# EAGLE board Battery Board v2 (EAGLE 6.4)
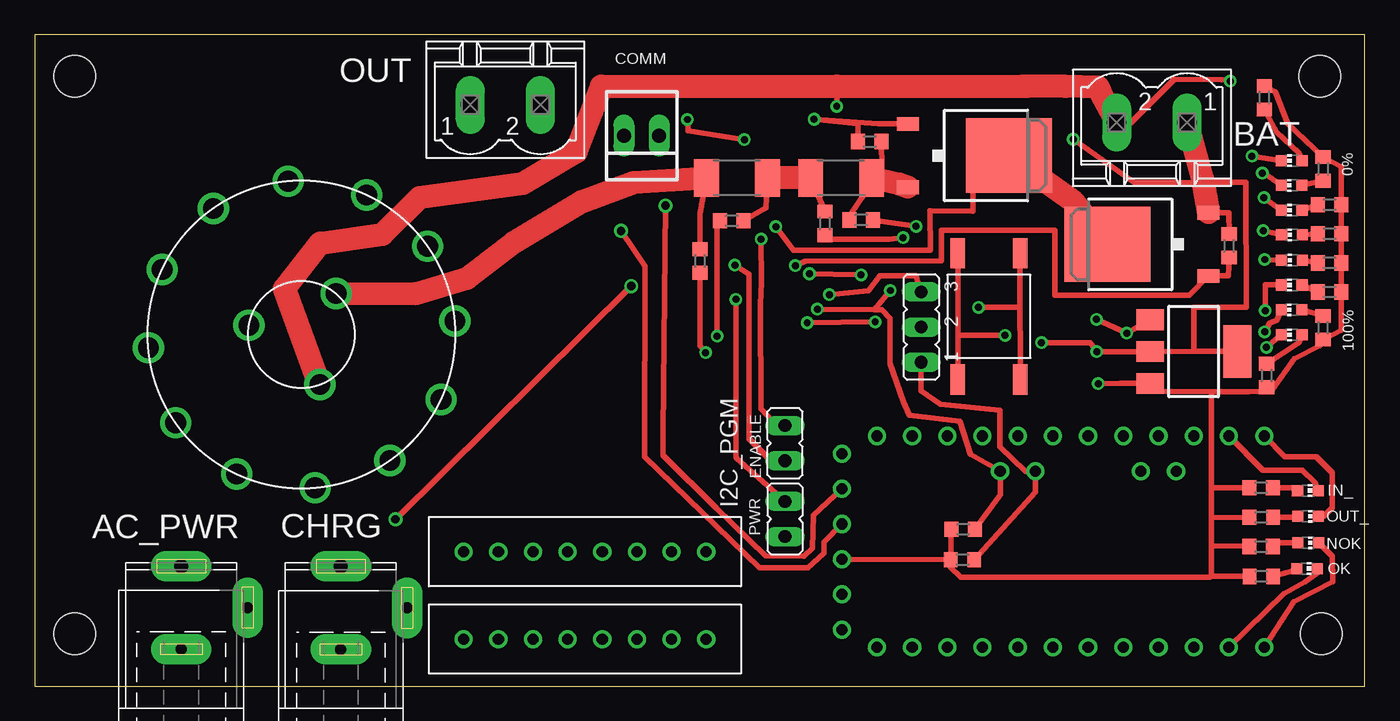
[diagram p0: board, top side]
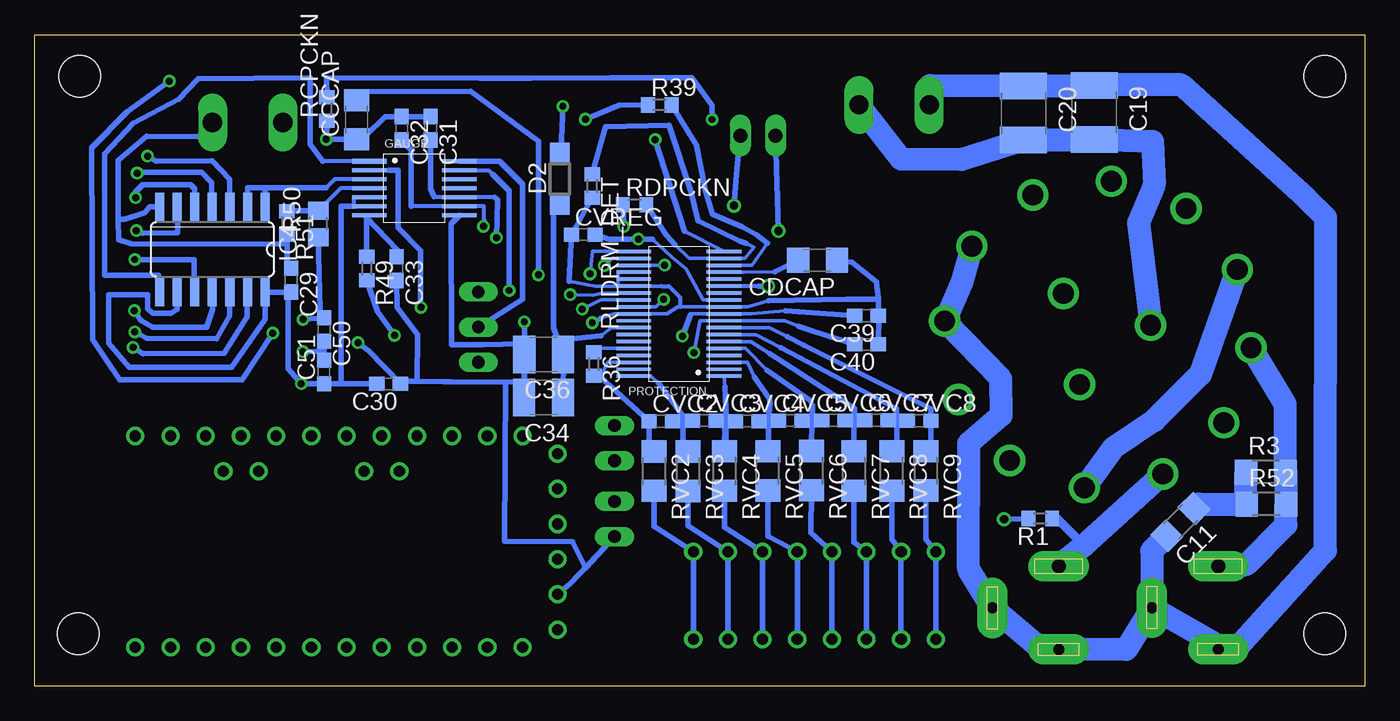
[diagram p1: board, bottom side, seen from below]

Size 96 x 47 mm. Coordinates in mm from the lower left corner, seen from the top.
Outline: 0,0 96,0 96,47 0,47 0,0
Copper layers (1*16): Top 0.035mm / dielectric 1.5mm / Bottom 0.035mm
Design rules "default *": minimum track width 8mil, minimum drill 0.3mm, track to track 8mil, track to pad 8mil, pad to pad 8mil, via to via 8mil, smd to smd 8mil, copper to edge 40mil, drill to drill 8mil, minimum pad ring 10mil, minimum via ring 8mil, stop-mask expansion 4mil, vias tented up to drill 0mil, thermal gap 10mil
Holes 3 mm at 2.89,3.77 2.89,44 92.76,44 92.84,3.78

## Footprints (pad centres in the part's own frame; a part is rotated, then mirrored left to right if it is on the bottom)
SPC4078 = drill 0.8 pad 2.184 long: 1 -3,0; 2 0,-4.8 | drill 1 pad 2.184 long: 3 3,0
MSTBV2 = drill 1.397 long: 1 -2.54,0; 2 2.54,0
8PIN-2.5MM = drill 0.8: P$1 0,8.75; P$2 0,6.25; P$3 0,3.75; P$4 0,1.25; P$5 0,-1.25; P$6 0,-3.75; P$7 0,-6.25; P$8 0,-8.75
C1206 = smd 1.6 x 1.8: 1 -1.4,0; 2 1.4,0
C1812 = smd 1.9 x 3.4: 1 -1.95,0; 2 1.95,0
C0603 = smd 1.1 x 1: 1 -0.85,0; 2 0.85,0
C1210 = smd 1.6 x 2.7: 1 -1.4,0; 2 1.4,0
22-23-2021 = drill 1 long: 1 -1.27,0; 2 1.27,0
SOD123 = smd 1.4 x 1.4: A 1.9,0; C -1.9,0
JP1 = drill 0.914 long: 1 0,-1.27; 2 0,1.27
TSSOP-14-0.65MM = smd 2.5 x 0.35: 1 -3.25,1.95 | smd 2.5 x 0.3: 2 -3.25,1.3; 3 -3.25,0.65; 4 -3.25,0; 5 -3.25,-0.65; 6 -3.25,-1.3; 7 -3.25,-1.95; 8 3.25,-1.95; 9 3.25,-1.3; 10 3.25,-0.65; 11 3.25,0; 12 3.25,0.65; 13 3.25,1.3; 14 3.25,1.95
JP2 = drill 0.914 long: 1 -2.54,0; 2 0,0; 3 2.54,0
SO14 = smd 0.66 x 2.032: 1 -3.81,-3.073; 2 -2.54,-3.073; 3 -1.27,-3.073; 4 0,-3.073; 5 1.27,-3.073; 6 2.54,-3.073; 7 3.81,-3.073; 8 3.81,3.073; 9 2.54,3.073; 10 1.27,3.073; 11 0,3.073; 12 -1.27,3.073; 13 -2.54,3.073; 14 -3.81,3.073
CHIP-LED0603 = smd 0.8 x 0.8: A 0,-0.75; C 0,0.75
TSSOP-38-0.5MM = smd 2.5 x 0.25: 1 -3.25,4.65; 2 -3.25,4.15; 3 -3.25,3.65; 4 -3.25,3.15; 5 -3.25,2.65; 6 -3.25,2.15; 7 -3.25,1.65; 8 -3.25,1.15; 9 -3.25,0.65; 10 -3.25,0.15; 11 -3.25,-0.35; 12 -3.25,-0.85; 13 -3.25,-1.35; 14 -3.25,-1.85; 15 -3.25,-2.35; 16 -3.25,-2.85; 17 -3.25,-3.35; 18 -3.25,-3.85; 19 -3.25,-4.35; 20 3.25,-4.35; 21 3.25,-3.85; 22 3.25,-3.35; 23 3.25,-2.85; 24 3.25,-2.35; 25 3.25,-1.85; 26 3.25,-1.35; 27 3.25,-0.85; 28 3.25,-0.35; 29 3.25,0.15; 30 3.25,0.65; 31 3.25,1.15; 32 3.25,1.65; 33 3.25,2.15; 34 3.25,2.65; 35 3.25,3.15; 36 3.25,3.65; 37 3.25,4.15; 38 3.25,4.65
TO252 = smd 1 x 1.6: 1 -2.28,-4.8; 2 2.28,-4.8 | smd 5.4 x 6.2: 3 0,2.5
R0603 = smd 1 x 1.1: 1 -0.85,0; 2 0.85,0
R1206 = smd 1.6 x 1.803: 1 -1.422,0; 2 1.422,0
R2010 = smd 1.8 x 2.7: 1 -2.2,0; 2 2.2,0
R0805 = smd 1.3 x 1.5: 1 -0.95,0; 2 0.95,0
CK1026 = drill 1.5: 1 -2.87,-10.72; 2 -7.85,-7.85; 3 -10.72,-2.87; 4 -10.72,2.87; 5 -7.85,7.85; 6 -2.87,10.72; 7 2.87,10.72; 8 7.85,7.85; 9 10.72,2.87; 10 10.72,-2.87; 11 7.85,-7.85; 12 2.87,-10.72; A -3.35,-1.925; B 0,3.85; C 3.35,-1.925
ARDUINO-MINI-PRO = drill 0.8: 2 -7.62,2.54; 3 -7.62,0; 4 -7.62,-2.54; 5 -7.62,-5.08; 6 -7.62,-7.62; 7 -7.62,-10.16; 8 -7.62,-12.7; 9 -7.62,-15.24; 10 7.62,-15.24; 11 7.62,-12.7; 12 7.62,-10.16; 13 7.62,-7.62; A0 7.62,-5.08; A1 7.62,-2.54; A2 7.62,0; A3 7.62,2.54; A4 5.08,1.27; A5 5.08,3.81; A6 5.08,-8.89; A7 5.08,-6.35; BLK -6.35,15.24; GND -3.81,15.24; GND2 7.62,10.16; GND3 -7.62,5.08; GRN 6.35,15.24; RAW 7.62,12.7; RST 7.62,7.62; RST2 -7.62,7.62; RXI 1.27,15.24; RXI2 -7.62,10.16; TXO 3.81,15.24; TXO2 -7.62,12.7; VCC -1.27,15.24; VCC2 7.62,5.08
SOT223 = smd 1.5 x 2: 1 -2.3,-3.15; 2 0,-3.15; 3 2.3,-3.15 | smd 3.8 x 2: 4 0,3.15
PUSHBUTTON = smd 2.184 x 1.067: P$1 -4.55,2.25; P$2 4.55,2.25; P$3 -4.55,-2.25; P$4 4.55,-2.25

## Placement (x,y rotation side)
AC_PWR  [SPC4078]  10.58,5.66 90 top
BAT  MSTBV2  [MSTBV2]  80.63,40.65 180 top
BATT_CELL  JST-XH-8  [8PIN-2.5MM]  39.71,9.7 90 top
C11  2.2uF  [C1206]  13.31,11.83 225 bottom
C19  10uF  [C1812]  19.53,41.39 270 bottom
C20  10uF  [C1812]  24.63,41.34 270 bottom
C29  0.1uF  [C0603]  77.49,29.29 270 bottom
C30  0.1uF  [C0603]  70.45,21.81 180 bottom
C31  0.1uF  [C0603]  67.42,40.24 270 bottom
C32  0.1uF  [C0603]  69.51,40.24 270 bottom
C33  1uF  [C0603]  69.87,30.12 270 bottom
C34  10uF  [C1210]  59.28,20.82 180 bottom
C36  0.1uF  [C1210]  59.26,23.92 180 bottom
C39  0.1uF  [C0603]  35.97,26.73 180 bottom
C40  0.1uF  [C0603]  35.97,24.66 180 bottom
C50  1uF  [C0603]  75.11,25.73 270 bottom
C51  10uF  [C0603]  75.12,22.67 90 bottom
CCCAP  1uF  [C1206]  72.76,40.86 90 bottom
CDCAP  1uF  [C1206]  39.5,30.72 180 bottom
CHRG  [SPC4078]  22.09,5.64 90 top
CHRG_BAL  JST-XH-8  [8PIN-2.5MM]  39.71,3.4 90 top
COMM  22-23-2021  [22-23-2021]  43.8,39.72 180 top
CVC2  1uF  [C0603]  50.81,19.1 0 bottom
CVC3  1uF  [C0603]  47.67,19.15 0 bottom
CVC4  1uF  [C0603]  44.57,19.11 0 bottom
CVC5  1uF  [C0603]  41.46,19.16 0 bottom
CVC6  1uF  [C0603]  38.35,19.17 0 bottom
CVC7  1uF  [C0603]  35.25,19.18 0 bottom
CVC8  1uF  [C0603]  32.17,19.15 0 bottom
CVREG  1uF  [C0603]  56.4,32.57 0 bottom
D2  [SOD123]  58.09,36.59 90 bottom
ENABLE  [JP1]  54.14,17.52 180 top
GAUGE  BQ34Z100  [TSSOP-14-0.65MM]  68.6,35.92 0 bottom
I2C_SELECT  [JP2]  63.97,25.91 90 top
IC4  74HC164D  [SO14]  83.18,31.51 180 bottom
IN_  [CHIP-LED0603]  91.89,14.11 270 top
NOK  [CHIP-LED0603]  91.92,10.34 270 top
OK  [CHIP-LED0603]  91.82,8.48 270 top
OUT  MSTBV2  [MSTBV2]  33.97,41.94 0 top
OUT_  [CHIP-LED0603]  91.9,12.26 270 top
PROTECTION  BQ77908A  [TSSOP-38-0.5MM]  49.5,27.01 180 bottom
PWR  [JP1]  54.15,12.06 0 top
Q8  FDD8447L  [TO252]  79.91,31.87 90 top
Q9  FDD8447L  [TO252]  67.82,38.28 270 top
R1  10k  [R0603]  23.42,12.09 180 bottom
R2  100  [R0603]  88.51,14.31 0 top
R3  3.9  [R1206]  7.15,15.44 0 bottom
R4  100  [R0603]  88.52,12.18 0 top
R5  100  [R0603]  88.51,10.07 0 top
R6  100  [R0603]  88.53,7.92 0 top
R29  2.2k  [R0603]  66.96,9.12 0 top
R30  2.2k  [R0603]  67.01,11.31 0 top
R31  100  [R0603]  88.74,42.45 90 top
R32  100  [R0603]  92.99,37.32 90 top
R33  100  [R0603]  93.45,34.74 0 top
R34  100  [R0603]  93.45,32.65 0 top
R35  100  [R0603]  93.45,30.53 0 top
R36  100  [R0603]  55.64,23.23 270 bottom
R37  5M  [R0603]  86.2,31.77 270 top
R38  5M  [R0603]  60.27,39.28 180 top
R39  1k  [R0603]  50.88,41.93 0 bottom
R40  100  [R0603]  93.45,28.43 0 top
R41  100  [R0603]  92.98,25.85 270 top
R42  100  [R0603]  88.91,22.41 270 top
R43  0.01  [R2010]  58.21,36.66 180 top
R44  1k  [R0603]  48.02,30.67 90 top
R45  1k  [R0603]  50.31,33.58 0 top
R46  0.001  [R2010]  50.7,36.66 180 top
R47  100  [R0603]  59.65,33.63 180 top
R48  100  [R0603]  57.03,33.39 90 top
R49  1k  [R0603]  72.03,30.12 270 bottom
R50  460k  [R0805]  75.53,33.35 90 bottom
R51  16.5k  [R0603]  77.79,33.41 270 bottom
R52  3.9  [R1206]  7.11,13.13 0 bottom
RCPCKN  100  [R0603]  74.91,41.63 90 bottom
RDPCKN  100  [R0603]  52.71,34.72 0 bottom
RLDRM_DET  50k  [R0603]  55.76,36.09 270 bottom
RVC2  50  [R1206]  51.29,15.51 270 bottom
RVC3  50  [R1206]  48.83,15.5 270 bottom
RVC4  50  [R1206]  46.2,15.51 270 bottom
RVC5  50  [R1206]  43.08,15.53 270 bottom
RVC6  50  [R1206]  39.93,15.54 270 bottom
RVC7  50  [R1206]  36.86,15.51 270 bottom
RVC8  50  [R1206]  34.14,15.52 270 bottom
RVC9  50  [R1206]  31.67,15.53 270 bottom
SEL_SWITCH  CK1026  [CK1026]  19.27,25.37 200 top
SOC_LED1  [CHIP-LED0603]  90.72,37.91 90 top
SOC_LED2  [CHIP-LED0603]  90.71,36.13 90 top
SOC_LED3  [CHIP-LED0603]  90.72,34.34 90 top
SOC_LED4  [CHIP-LED0603]  90.74,32.56 90 top
SOC_LED5  [CHIP-LED0603]  90.73,30.73 90 top
SOC_LED6  [CHIP-LED0603]  90.72,28.94 90 top
SOC_LED7  [CHIP-LED0603]  90.71,27.15 90 top
SOC_LED8  [CHIP-LED0603]  90.72,25.34 90 top
U$1  ARDUINO-MINI-PRO  [ARDUINO-MINI-PRO]  73.49,10.43 90 top
U$2  MIC5239  [SOT223]  83.64,24.14 270 top
VIEW_SOC  PUSHBUTTON  [PUSHBUTTON]  68.87,26.67 90 top

## Library data of the parts
AC_PWR CHRG = con-jack; OC_FARNELL: unknown; OC_NEWARK: unknown
BAT OUT = con-phoenix-508; MPN: MSTBV 2,5/2-GF-5.08; OC_FARNELL: 1792792; OC_NEWARK: 69R9845
BATT_CELL CHRG_BAL GAUGE PROTECTION SEL_SWITCH U$1 VIEW_SOC = custom
C11 C19 C20 C29-C34 C36 C39 C40 C50 C51 CCCAP CDCAP CVC2-CVC8 CVREG R1-R6 R29-R52 RCPCKN RDPCKN RLDRM_DET RVC2-RVC9 = rcl
COMM = con-molex; MF: MOLEX; MPN: 22-23-2021; OC_FARNELL: 1462926; OC_NEWARK: 25C3832
D2 = diode
ENABLE I2C_SELECT PWR = jumper
IC4 = 74xx-eu
IN_ NOK OK OUT_ SOC_LED1-SOC_LED8 = led
Q8 Q9 = transistor-fet
U$2 = v-reg

## Nets
BAT+: BAT.2 C50.1 D2.A R50.1 SEL_SWITCH.B U$2.1
BAT-: R44.2 R46.2 SEL_SWITCH.A
DC_IN: AC_PWR.3 R3.2 R52.2 SEL_SWITCH.10
GND4: AC_PWR.1 AC_PWR.2 C11.2 C19.1 C20.1 CHRG.1 CHRG.2 OUT.1 SEL_SWITCH.3 SEL_SWITCH.4
GND5: BAT.1 C29.1 C30.1 C31.1 C32.1 C33.2 C34.2 C36.2 C39.1 C40.1 C50.2 C51.2 CCCAP.1 CDCAP.1 CVREG.1 GAUGE.8 IC4.7 PROTECTION.11 PROTECTION.23 PROTECTION.24 PROTECTION.25 PROTECTION.29 PWR.1 Q8.2 R37.1 R51.2 RCPCKN.1 RLDRM_DET.2 U$1.GND U$2.2 U$2.4
N$2: CHRG.3 R1.1 SEL_SWITCH.8
N$3: PROTECTION.14 R1.2
N$4: COMM.2 U$1.RXI
N$5: SEL_SWITCH.7 SEL_SWITCH.11
N$6: COMM.1 U$1.TXO
N$7: IN_.A R2.2
N$8: IN_.C U$1.11
N$9: OK.A R6.2
N$10: NOK.A R5.2
N$11: OUT_.A R4.2
N$12: OUT_.C U$1.10
N$13: C11.1 R3.1 R52.1
N$14: NOK.C U$1.9
N$15: OK.C U$1.8
N$46: C19.2 C20.2 OUT.2 SEL_SWITCH.C
N$58: Q8.3 Q9.3 RDPCKN.1
N$61: C32.2 GAUGE.9 R47.1
N$66: C34.1 C36.1 D2.C PROTECTION.31
N$68: BATT_CELL.P$8 CHRG_BAL.P$8 RVC2.2
N$71: CVC8.2 PROTECTION.8 RVC9.1
N$72: CVC2.1 PROTECTION.36 R36.2 RVC2.1
N$73: CVC4.2 CVC5.1 PROTECTION.3 RVC5.1
N$74: CVC2.2 CVC3.1 PROTECTION.38 RVC3.1
N$75: PROTECTION.34 R36.1
N$76: CVC6.2 CVC7.1 PROTECTION.6 RVC7.1
N$77: CVC5.2 CVC6.1 PROTECTION.5 RVC6.1
N$78: CVC3.2 CVC4.1 PROTECTION.1 RVC4.1
N$79: BATT_CELL.P$7 CHRG_BAL.P$7 RVC3.2
N$80: BATT_CELL.P$6 CHRG_BAL.P$6 RVC4.2
N$81: BATT_CELL.P$5 CHRG_BAL.P$5 RVC5.2
N$82: BATT_CELL.P$4 CHRG_BAL.P$4 RVC6.2
N$83: BATT_CELL.P$3 CHRG_BAL.P$3 RVC7.2
N$84: BATT_CELL.P$2 CHRG_BAL.P$2 RVC8.2
N$85: BATT_CELL.P$1 CHRG_BAL.P$1 RVC9.2
N$86: C33.1 GAUGE.7 R49.1
N$87: Q9.1 R38.2 R39.1
N$88: PROTECTION.21 Q8.1 R37.2
N$89: PROTECTION.17 R39.2
N$90: CDCAP.2 PROTECTION.16
N$91: CVC7.2 CVC8.1 PROTECTION.7 RVC8.1
N$92: PROTECTION.18 RDPCKN.2 RLDRM_DET.1
N$93: R31.1 SOC_LED1.A
N$94: PROTECTION.19 RCPCKN.2
N$95: CCCAP.2 PROTECTION.20
N$96: R32.1 SOC_LED2.A
N$97: C39.2 PROTECTION.10 R45.1
N$99: C40.2 PROTECTION.9 R44.1
N$102: R33.1 SOC_LED3.A
N$103: ENABLE.2 PROTECTION.22
N$104: PROTECTION.28 PWR.2
N$106: R34.1 SOC_LED4.A
N$107: R35.1 SOC_LED5.A
N$108: R40.1 SOC_LED6.A
N$109: R41.1 SOC_LED7.A
N$110: R42.1 SOC_LED8.A
N$111: IC4.13 SOC_LED8.C
N$112: IC4.3 SOC_LED1.C
N$113: IC4.4 SOC_LED2.C
N$114: IC4.5 SOC_LED3.C
N$115: IC4.6 SOC_LED4.C
N$116: IC4.10 SOC_LED5.C
N$118: IC4.12 SOC_LED7.C
N$120: I2C_SELECT.3 PROTECTION.26
N$121: GAUGE.14 I2C_SELECT.2
N$122: C31.2 GAUGE.10 R48.1
N$123: GAUGE.3 IC4.1 IC4.2
N$124: GAUGE.1 IC4.8
N$126: R49.2 VIEW_SOC.P$1 VIEW_SOC.P$2
N$127: GAUGE.2 VIEW_SOC.P$3 VIEW_SOC.P$4
N$128: GAUGE.4 R50.2 R51.1
N$130: CVREG.2 ENABLE.1 PROTECTION.12
N$131: R43.2 R45.2 R46.1 R48.2
N$132: Q9.2 R38.1 R43.1 R47.2
SCL: GAUGE.13 PROTECTION.27 R30.2 U$1.A5
SDA: I2C_SELECT.1 R29.2 U$1.A4
SOC_LED6: IC4.11 SOC_LED6.C
VCC3.3: C29.2 C30.2 C51.1 GAUGE.5 GAUGE.6 IC4.9 IC4.14 R2.1 R4.1 R5.1 R6.1 R29.1 R30.1 R31.2 R32.2 R33.2 R34.2 R35.2 R40.2 R41.2 R42.2 U$1.VCC U$2.3

## Tracks (layer width: path | path; a pad name or v marks a point on that pad's centre or on a via)
BAT+  (via drill 0.5)
  Top 0.406: v76.63,26.46 v78.81,25.47 U$2.1 | BAT.2 79.09,40.62 82.24,43.78 85.69,43.76 v86.29,43.65 | 57.88,43.28 57.89,42.01 v57.88,41.83
  Top 1.676: BAT.2 76.96,42.76 76.94,42.82 76.76,43.22 74.41,43.26 71.79,43.28 | 71.79,43.28 71.29,43.28 | SEL_SWITCH.B 18.04,28.67 20.61,31.96 25.11,32.59 27.81,35.27 35.24,36.26 39.08,38.55 40.9,43.29 57.88,43.28 71.79,43.28
  Bottom 0.406: D2.A 58.01,38.76 v57.88,41.83 | R50.1 75.41,27.13 C50.1 76.6,26.46 v76.63,26.46 | v86.29,43.65 89.33,41.45 91.89,38.84 91.82,25 89.87,22.11 81.02,22.11 78.85,25.4 v78.81,25.47
BAT-
  Top 0.406: R44.2 48,34.07 R46.2
  Top 1.676: SEL_SWITCH.A 27.51,28.32 31.2,29.41 34.61,32.03 39.48,34.96 43.27,36.34 R46.2
DC_IN
  Bottom 1.676: AC_PWR.3 10.4,8.72 10.1,8.76 8.57,8.76 5.7,11.63 5.7,13.12 R52.2 5.69,15.4 R3.2 5.75,20.34 SEL_SWITCH.10
GND4
  Bottom 1.676: AC_PWR.2 10.32,2.77 AC_PWR.1 9.49,2.45 2.84,9.78 2.84,33.83 4.22,35.19 13.26,43.37 19.5,43.37 C19.1 19.59,43.29 C20.1 31.38,43.32 OUT.1 | AC_PWR.2 17.24,2.64 CHRG.1 23.38,2.68 CHRG.2 28.6,8.47 28.59,17.52 26.25,19.52 26.27,22.17 SEL_SWITCH.4 29.07,29.19 SEL_SWITCH.3 | C11.2 15.38,9.76 AC_PWR.2
GND5  (via drill 0.5)
  Top 0.406: 84.28,36.62 84.36,36.36 87.42,36.35 87.43,27.32 83.67,27.32 83.66,24.18 | 83.66,24.18 U$2.2 76.79,24.13 v76.64,24.13 76.21,24.79 v72.66,24.79 | R37.1 86.18,34.16 Q8.2 | v74.96,39.46 79.33,36.35 84.34,36.33 | 83.66,24.18 86.75,24.18 U$2.4 | v60.66,26.27 v55.76,26.21
  Top 1.676: BAT.1 84.34,36.33 84.28,36.62 Q8.2
  Bottom 0.254: PROTECTION.23 53.88,29.86 53.88,29.37 PROTECTION.24 53.9,29.35 53.9,28.86 | 53.9,28.86 50.77,28.86 PROTECTION.25 | 55.16,26.55 54.19,26.86 PROTECTION.29 50.35,26.86 49.59,27.36 49.41,27.36 48.18,27.36 PROTECTION.11 44.52,27.36 43.06,27.82 | 57.43,29.22 55.52,28.85 53.9,28.86
  Bottom 0.305: 50.77,28.86 50.23,28.86 49.42,28.05 49.42,27.38 49.41,27.36
  Bottom 0.406: C40.1 35.08,26.1 C39.1 35.12,27.93 | v74.96,39.46 74.93,40.06 RCPCKN.1 74.94,39.46 CCCAP.1 72.5,39.72 72.1,39.72 70.72,41.09 C32.1 67.32,41.09 C31.1 67.19,41.1 | C29.1 77.79,30.44 R51.2 77.79,31.89 89.04,31.9 89.95,32.2 89.95,33.67 | C51.2 75.11,24.14 | 75.11,24.14 C50.2 | C33.2 69.84,27.34 68.38,25.34 68.41,21.98 | 68.41,21.98 68.61,21.98 69.4,21.99 69.5,21.97 C30.1 71.9,24.2 v72.66,24.79 | IC4.7 87.68,34.58 88.04,34.17 89.51,33.67 89.95,33.67 | 89.95,33.67 89.95,37.94 87.91,39.65 84.19,39.62 BAT.1 | v76.64,24.13 75.17,24.15 75.11,24.14 | 68.41,21.98 66.45,21.96 66.26,21.97 66,21.97 62,21.93 | 62,21.93 60.65,21.97 60.65,22.45 C34.2 60.63,24.65 C36.2 v60.66,26.27 60.66,25.84 60.66,24.7 63.7,24.62 65.92,24.63 65.95,33.37 GAUGE.8 | 57.43,29.22 CVREG.1 RLDRM_DET.2 | 43.06,27.82 37.37,27.93 35.12,27.93 | CDCAP.1 37.03,30.57 35.25,29.18 35.12,27.93 | 55.16,26.55 55.18,26.52 v55.76,26.21 | 62,21.93 62.07,10.46 57.17,10.42 56.24,8.52 PWR.1 57.35,7.4 U$1.GND
N$2
  Bottom 0.61: R1.1 22.36,12.24 20.27,10.15
  Bottom 1.676: CHRG.3 21.93,8.84 20.27,10.15 SEL_SWITCH.8
N$3  (via drill 0.6)
  Top 0.406: v26.04,12.04 v43.06,28.86
  Bottom 0.305: 43.71,28.86 PROTECTION.14
  Bottom 0.406: R1.2 v26.04,12.04 | v43.06,28.86 43.71,28.86
N$4  (via drill 0.6)
  Top 0.406: v42.32,32.84 44.04,30.3 44.01,16.57 52.29,8.54 55.81,8.53 56.96,9.58 56.96,10.4 U$1.RXI
  Bottom 0.406: COMM.2 v42.32,32.84
N$5
  Bottom 1.676: SEL_SWITCH.11 11.87,22.5 15.19,19.18 18.17,17.15 SEL_SWITCH.7
N$6  (via drill 0.6)
  Top 0.406: v45.52,34.67 45.36,18.29 45.36,16.67 49.22,12.82 52.74,9.39 55.5,9.39 56.12,9.94 56.2,12.33 U$1.TXO
  Bottom 0.406: COMM.1 45.3,37.37 v45.52,34.67
N$7
  Top 0.406: IN_.A 90.95,14.31 R2.2
N$8
  Top 0.406: U$1.11 88.65,15.59 91.49,15.59 92.38,14.7 IN_.C
N$9
  Top 0.406: OK.A 90.83,8.34 R6.2
N$10
  Top 0.406: R5.2 89.5,10.34 NOK.A
N$11
  Top 0.406: OUT_.A 91.06,12.2 R4.2
N$12
  Top 0.406: U$1.10 90.21,16.57 92.49,16.57 93.64,15.41 93.64,12.88 93.02,12.26 OUT_.C
N$13
  Bottom 1.676: C11.1 12.02,13.12 R52.1 8.57,13.17 R3.1
N$14
  Top 0.406: U$1.9 90.85,6.08 93.67,7.52 93.66,9.36 92.93,10.09 NOK.C
N$15
  Top 0.406: OK.C 92.7,8.27 91.7,7.52 90.14,6.67 U$1.8
N$46
  Bottom 1.676: OUT.2 33.45,38.01 29.1,37.98 C20.2 19.59,39.39 C19.2 15.33,39.3 15.21,36.18 16.34,33.44 SEL_SWITCH.C
N$58  (via drill 0.5)
  Top 0.406: v53.48,33.15 54.76,31.46 64.64,31.45 64.63,34.3 67.72,34.27 67.72,37.65 70.64,37.65 Q9.3 | 75.31,34.28 75.02,34.89
  Top 1.676: Q8.3 75.02,34.89 Q9.3
  Bottom 0.406: RDPCKN.1 53.49,33.95 v53.48,33.15
N$61  (via drill 0.5)
  Top 0.406: v63.61,33.17 60.58,33.62 R47.1
  Bottom 0.305: 63.58,33.57 63.57,34.61 GAUGE.9 68.83,34.62
  Bottom 0.406: 63.58,33.57 v63.61,33.17 | 68.83,34.62 68.83,38.71 C32.2
N$66
  Bottom 0.254: PROTECTION.31 54.38,25.85 55.13,25.29
  Bottom 0.406: 55.13,25.29 58.23,24.95 58.15,25.03 C36.1 | C36.1 57.84,23.9 C34.1 | C36.1 58.56,25.87 58.56,34.11 D2.C
N$68
  Bottom 0.406: CHRG_BAL.P$8 BATT_CELL.P$8 51.3,11.54 RVC2.2
N$71
  Bottom 0.254: PROTECTION.8 42.98,25.87 41.67,25.21
  Bottom 0.406: RVC9.1 31.3,17.05 CVC8.2 31.32,17.76 31.32,20.03 40.48,24.59 41.67,25.21
N$72
  Bottom 0.254: PROTECTION.36 54.65,23.36 55.16,22.27
  Bottom 0.406: RVC2.1 51.61,16.38 CVC2.1 51.68,19.14 55.16,22.27 55.15,22.29 55.86,22.24 R36.2
N$73
  Bottom 0.254: PROTECTION.3 44.56,23.37 44.04,22.27
  Bottom 0.406: CVC4.2 43.07,19.09 42.95,19.13 | 42.95,19.13 CVC5.1 | RVC5.1 43,19.18 | 44.04,22.27 42.95,20.75 42.94,20.44 42.99,19.55 43,19.18 | 43,19.18 42.95,19.13
N$74
  Bottom 0.254: PROTECTION.38 51.53,22.37 50.96,21.86
  Bottom 0.406: CVC2.2 49.25,19.1 49.2,19.5 | 49.2,19.5 CVC3.1 | RVC3.1 49.22,16.49 49.2,19.5 | 50.96,21.86 49.2,19.5
N$75
  Bottom 0.254: PROTECTION.34 55.69,24.36 55.68,24.34
  Bottom 0.406: 55.68,24.34 55.85,24.32 R36.1
N$76
  Bottom 0.254: PROTECTION.6 44.29,24.86 42.92,23.98
  Bottom 0.406: CVC6.2 36.85,19.14 36.82,19.12 | 36.82,19.12 CVC7.1 | RVC7.1 36.86,19.07 36.82,19.12 | 42.92,23.98 36.85,20.05 36.82,19.12
N$77
  Bottom 0.254: PROTECTION.5 44.71,24.36 43.15,22.78
  Bottom 0.406: CVC5.2 39.85,19.19 39.87,19.24 | 39.87,19.24 39.9,19.08 | 39.9,19.08 CVC6.1 | RVC6.1 39.94,17.3 39.9,19.08 | 43.15,22.78 40.05,20.64 39.85,20.25 39.87,19.24
N$78
  Bottom 0.254: PROTECTION.1 46.18,21.6
  Bottom 0.406: CVC3.2 46.14,19.18 46.28,19.21 | 46.28,19.21 CVC4.1 | RVC4.1 46.16,19.21 46.28,19.21 | 46.18,21.6 46.1,20.03 46.1,17.78 46.28,19.21
N$79
  Bottom 0.406: CHRG_BAL.P$7 BATT_CELL.P$7 48.83,11.58 RVC3.2
N$80
  Bottom 0.406: CHRG_BAL.P$6 BATT_CELL.P$6 46.2,11.45 RVC4.2
N$81
  Bottom 0.406: CHRG_BAL.P$5 BATT_CELL.P$5 43.08,10.83 RVC5.2
N$82
  Bottom 0.406: CHRG_BAL.P$4 BATT_CELL.P$4 39.96,11.07 RVC6.2
N$83
  Bottom 0.406: CHRG_BAL.P$3 BATT_CELL.P$3 36.86,10.39 RVC7.2
N$84
  Bottom 0.406: CHRG_BAL.P$2 BATT_CELL.P$2 34.14,10.61 RVC8.2
N$85
  Bottom 0.406: CHRG_BAL.P$1 BATT_CELL.P$1 31.67,10.58 RVC9.2
N$86
  Bottom 0.305: GAUGE.7 72.04,33.79
  Bottom 0.406: R49.1 72.04,33.79 69.84,31.49 C33.1
N$87  (via drill 0.5)
  Top 0.406: Q9.1 60.91,40.56 v56.24,40.9 59.42,40.55 R38.2
  Bottom 0.406: v56.24,40.9 53.84,41.9 R39.1
N$88  (via drill 0.5)
  Top 0.406: R37.2 86.16,29.6 Q8.1 83.34,28.21 73.62,28.2 73.61,32.87 65.45,32.89 65.45,30.68 55.6,30.67 55.12,30.45 v54.9,30.34
  Bottom 0.254: PROTECTION.21 54.3,30.86 v54.9,30.34
N$89
  Bottom 0.254: PROTECTION.17 44.22,30.36 43.12,31.94
  Bottom 0.406: 43.12,31.94 43.91,32.57 44.97,33.15 47.08,34.05 47.6,35.69 48.22,39.04 R39.2
N$90
  Bottom 0.254: PROTECTION.16 44.81,29.86 44.8,29.87 42.58,29.9
  Bottom 0.406: 42.58,29.9 CDCAP.2
N$91
  Bottom 0.254: PROTECTION.7 43.95,25.36 42.12,24.42
  Bottom 0.406: CVC7.2 33.93,19.13 33.78,19.09 | 33.78,19.09 CVC8.1 | RVC8.1 33.76,17.3 33.78,19.09 | 42.12,24.42 33.8,20 33.78,19.09
N$92
  Bottom 0.254: 44.66,31.96 44.09,31.67 44.75,30.86 PROTECTION.18 48.79,30.86 49.78,31.86
  Bottom 0.406: 44.66,31.96 45.09,32.11 48.13,33.59 48.62,35.66 50.22,40.46 54.79,40.34 RLDRM_DET.1 | RDPCKN.2 50.45,32.56 49.78,31.86
N$93
  Top 0.406: SOC_LED1.A 91.24,38.47 89.64,39.98 R31.1
N$94  (via drill 0.5)
  Top 0.406: v51.23,39.43 47.14,40.05 v47.11,40.88
  Bottom 0.254: PROTECTION.19 49.1,32.82
  Bottom 0.406: 49.1,32.82 v51.23,39.43 | v47.11,40.88 47.13,41.9 48.55,43.89 54.4,43.89 60.19,43.87 63.84,43.87 74.92,43.89 RCPCKN.2
N$95  (via drill 0.5)
  Top 0.406: v55.92,29.75 59.33,29.67 v59.64,29.67
  Bottom 0.254: PROTECTION.20 55.73,31.36 v55.92,29.75
  Bottom 0.406: v59.64,29.67 59.65,39.32 64.54,42.91 72.76,42.88 CCCAP.2
N$96
  Top 0.406: SOC_LED2.A R32.1
N$97  (via drill 0.5)
  Top 0.406: v49.26,25.25 49.26,33.37 R45.1
  Bottom 0.254: 48.66,26.79 48.64,26.86 PROTECTION.10 44.26,26.85 41.81,27.1
  Bottom 0.406: 48.66,26.79 v49.26,25.25 | 41.81,27.1 40.88,27.02 C39.2
N$99  (via drill 0.5)
  Top 0.406: v48.42,24.06 48.03,24.56 R44.1
  Bottom 0.254: v48.42,24.06 47.98,26.37 PROTECTION.9 41.84,26.36 40.88,25.97
  Bottom 0.406: C40.2 39.83,25.62 40.88,25.97
N$102
  Top 0.406: SOC_LED3.A R33.1
N$103  (via drill 0.5)
  Top 0.406: v50.53,30.38 51.56,29.73 51.55,20.47 51.54,17.86 52.93,16.47 ENABLE.2
  Bottom 0.254: v50.53,30.38 51.35,30.36 PROTECTION.22
N$104  (via drill 0.5)
  Top 0.406: v50.6,27.91 50.62,27.82 50.62,16.56 50.63,16.45 PWR.2
  Bottom 0.254: PROTECTION.28 51.14,27.36 v50.6,27.91
N$106
  Top 0.406: SOC_LED4.A R34.1
N$107
  Top 0.406: SOC_LED5.A R35.1
N$108
  Top 0.406: R40.1 SOC_LED6.A
N$109
  Top 0.406: R41.1 SOC_LED7.A
N$110
  Top 0.406: R42.1 91.24,24.77 SOC_LED8.A
N$111  (via drill 0.5)
  Top 0.406: v88.89,24.44 88.89,24.45 SOC_LED8.C
  Bottom 0.406: IC4.13 80.65,26.65 82.33,24 88.16,23.99 v88.89,24.44
N$112  (via drill 0.5)
  Top 0.406: SOC_LED1.C v87.86,38.22 v87.86,38.23
  Bottom 0.406: v87.86,38.23 87.23,37.86 83.19,37.89 81.92,36.55 IC4.3
N$113  (via drill 0.5)
  Top 0.406: v88.6,37.01 88.76,36.99 SOC_LED2.C
  Bottom 0.406: IC4.4 83.22,36.33 83.95,37.06 88.01,37.06 88.41,37.08 v88.6,37.01
N$114  (via drill 0.5)
  Top 0.406: v88.71,35.25 SOC_LED3.C
  Bottom 0.406: IC4.5 84.47,35.88 84.74,36.16 88.21,36.17 88.71,35.67 v88.71,35.25
N$115  (via drill 0.5)
  Top 0.406: v88.67,32.86 SOC_LED4.C
  Bottom 0.406: IC4.6 85.69,32.72 88.19,32.69 v88.67,32.86
N$116  (via drill 0.5)
  Top 0.406: SOC_LED5.C v88.77,30.78
  Bottom 0.406: v88.77,30.78 84.47,30.78 IC4.10
N$118  (via drill 0.5)
  Top 0.406: SOC_LED7.C 89.64,26.4 89.08,26.18 88.8,25.57 v88.77,25.56
  Bottom 0.406: v88.77,25.56 87.91,25.09 82.88,25.07 81.92,26.72 IC4.12
N$120  (via drill 0.5)
  Top 0.406: v57.35,28.24 60.17,28.51 61.02,29.61 63.59,29.61 I2C_SELECT.3
  Bottom 0.254: PROTECTION.26 55.04,28.36 55.72,28.2 v57.35,28.24
N$121
  Bottom 0.406: I2C_SELECT.2 60.8,27.92 60.79,36.21 62.44,37.87 GAUGE.14
N$122  (via drill 0.5)
  Top 0.406: R48.1 56.99,32.24 61.67,32.24 v62.68,32.36
  Bottom 0.305: 62.79,35.27 GAUGE.10 67.19,35.27 67.22,35.37
  Bottom 0.406: v62.68,32.36 62.6,35.07 62.79,35.27 | 67.22,35.37 67.42,35.88 C31.2
N$123
  Bottom 0.305: GAUGE.3 74.36,36.57 74.96,35.97
  Bottom 0.406: IC4.2 80.64,35.96 79.36,35.96 | 79.36,35.96 IC4.1 | 74.96,35.97 79.35,35.97 79.36,35.96
N$124
  Bottom 0.305: GAUGE.1 75.22,37.87 75.23,37.88
  Bottom 0.406: 75.23,37.88 76.11,39.1 76.12,43.88 84.21,43.83 85.61,42.34 88.89,40.6 90.95,38.4 90.94,29.64 87.03,29.63 87.03,28.43 IC4.8
N$126  (via drill 0.5)
  Top 0.406: 66.64,25.32 VIEW_SOC.P$1 | v70.03,25.31 66.64,25.32 | 66.64,25.32 VIEW_SOC.P$2
  Bottom 0.406: R49.2 71.23,27.02 v70.03,25.31
N$127  (via drill 0.5)
  Top 0.406: v68.12,27.33 70.91,27.33 71.04,27.32 71.12,27.48 | VIEW_SOC.P$4 71.12,29.37 71.12,27.48 | 71.12,27.48 71.14,23.85 VIEW_SOC.P$3
  Bottom 0.305: GAUGE.2 70.41,37.21
  Bottom 0.406: 70.41,37.21 69.78,37.21 69.78,33.07 68.13,31.43 68.13,27.75 v68.12,27.33
N$128
  Bottom 0.305: GAUGE.4 73.91,35.92 R50.2
  Bottom 0.406: R50.2 77.75,34.3 R51.1
N$130  (via drill 0.5)
  Top 0.406: v52.43,32.25 52.44,29.15 52.37,27.54 52.4,20 53.35,19.01 ENABLE.1
  Bottom 0.254: PROTECTION.12 47.77,27.87 48.99,30.12 50.01,30.96 51.42,32.25
  Bottom 0.406: 51.42,32.25 v52.43,32.25 54.54,32.25 CVREG.2
N$131
  Top 0.406: R45.2 52.77,34.5 R46.1 | R43.2 56.88,34.59 R48.2
  Top 1.676: R43.2 54.87,36.68 R46.1
N$132
  Top 0.406: R38.1 61.13,37.35 | 61.13,37.35 R43.1 | 61.13,37.35 58.83,33.99 R47.2
  Top 1.676: Q9.2 62.38,36.22 R43.1
SCL  (via drill 0.5)
  Top 0.406: v56.49,27.2 60.59,27.14 | 60.59,27.14 v61.75,28.54 | 60.59,27.14 61.15,27.14 61.73,26.55 61.73,23.28 62.71,20.5 63.12,19.53 66.78,19.12 67.53,16.73 U$1.A5 69.68,13.8 R30.2
  Bottom 0.254: PROTECTION.27 55.12,27.86 v56.49,27.2
  Bottom 0.305: GAUGE.13 63.22,37.22 62.94,36.94
  Bottom 0.406: 62.94,36.94 61.75,35.74 v61.75,28.54
SDA
  Top 0.406: I2C_SELECT.1 63.97,21.31 65.38,20.35 69.67,19.92 69.67,17.27 71.49,15.51 U$1.A4 72.22,14 R29.2
SOC_LED6  (via drill 0.5)
  Top 0.406: SOC_LED6.C 88.81,28.96 v88.8,27.09
  Bottom 0.406: v88.8,27.09 88.36,26.38 87.49,25.9 83.59,25.88 83.17,27.2 IC4.11
VCC3.3  (via drill 0.5)
  Top 0.406: R31.2 89.54,42.88 90.44,40.58 R32.2 94.3,37.48 R33.2 R34.2 R35.2 R40.2 94.3,25.66 R41.2 92.76,24.55 90.91,23.63 89.31,21.38 R42.2 88.89,21.71 88.9,21.28 87.58,21.25 84.91,21.25 | 84.91,21.25 81.37,21.26 U$2.3 78.36,21.86 v76.76,21.82 | R6.1 84.91,7.93 | 84.91,7.93 84.92,10.11 | 84.92,10.11 84.92,12.16 | 84.92,12.16 84.91,14.31 | 84.91,14.31 84.91,21.25 | R2.1 84.91,14.31 | R4.1 84.92,12.16 | R5.1 87.61,10.06 87.61,10.12 84.92,10.11 | U$1.VCC R29.1 | R30.1 R29.1 | R29.1 66.11,8.56 66.83,7.84 84.82,7.84 84.91,7.93
  Bottom 0.305: GAUGE.6 72.94,34.62 72.94,35.27 GAUGE.5 | GAUGE.5
  Bottom 0.406: IC4.14 C29.2 | 72.94,34.62 73.88,34.6 73.88,23.77 | 73.88,23.77 73.89,21.8 C51.1 76.36,21.8 v76.76,21.82 77.69,22.88 77.72,28.42 IC4.14 | C30.2 73.88,21.81 73.88,23.77 | IC4.14 79.36,26.48 81.79,22.99 89.16,22.99 90.67,24.74 90.67,27.96 90.67,28.22 87.85,28.23 87.84,27.22 87.48,26.9 86.15,26.9 85.72,27.2 IC4.9

## Text on the board
tNames: 0% | 100% | I2C_PGM